# Altium PCB FPGA.PcbDoc (part 4 of 4)
Units mil, origin at the board's own origin, x right, y up, seen from the top; angles counter-clockwise.
Board outline 4000 x 2400 mil, 6 copper layers (Top Layer, InternalPlane1, MidLayer1, InternalPlane2, InternalPlane3, Bottom Layer), stack 58.8 mil thick; 235 components, 235 nets, 1406 pads, 621 vias.
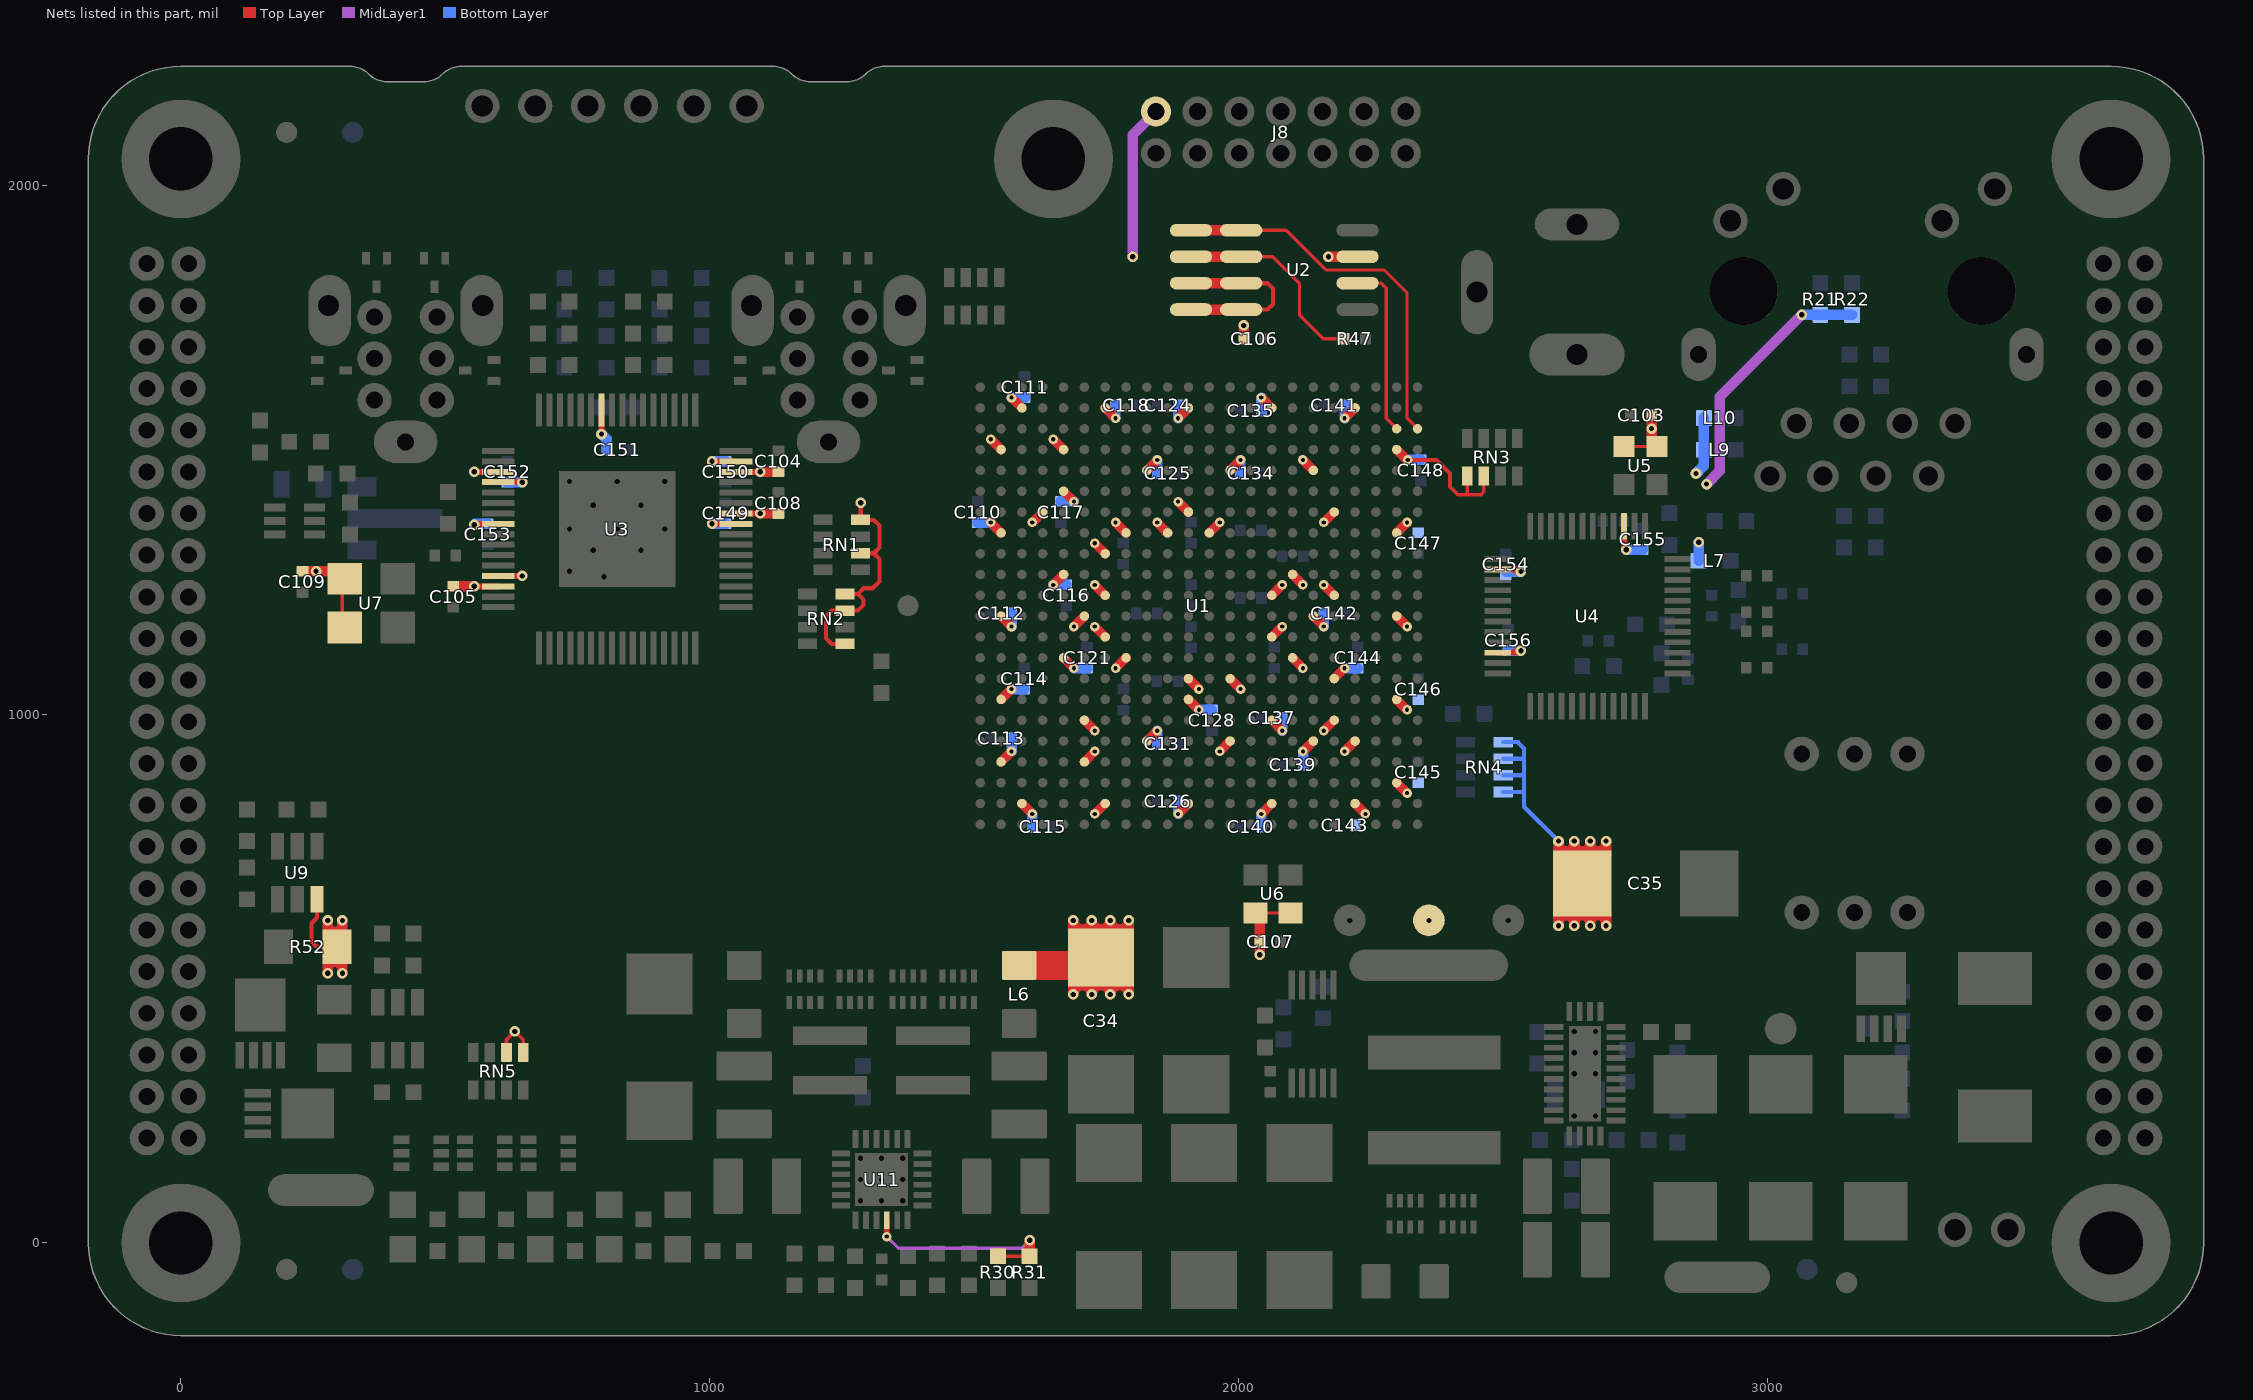
[diagram p8: the nets of this part, all layers, seen from the top]

## Via types
v1: diameter 20, hole 10, Top Layer to Bottom Layer, tented both sides, 322 vias
v2: diameter 18, hole 8, Top Layer to Bottom Layer, tented both sides, 299 vias

## Nets (pads, with @x,y where several pads share a name; then routed paths per layer and width w, separated by ;. In a path a pad name is that pad's centre, name@x,y a point inside that pad or via, vN(x,y) a via of type N, cw(c..) or ccw(c..) an arc to the next point about the centre after c; other vN are vias at no path point) (continued)
VCC3: C34.1 C35.1 C103.1 C104.1 C105.1 C106.1 C107.1 C108.1 C109.1 C110.1 C111.1 C112.1 C113.1 C114.1 C115.1 C116.1 C117.1 C118.1 C121.1 C124.1 C125.1 C126.1 C128.1 C131.1 C134.1 C135.1 C137.1 C139.1 C140.1 C141.1 C142.1 C143.1 C144.1 C145.1 C146.1 C147.1 C148.1 C149.1 C150.1 C151.1 C152.1 C153.1 C154.1 C155.1 C156.1 J8.2 L6.2 L7.1 L9.1 L10.1 pad.0@1910,1765 pad.0@1910,1815 pad.0@2360,610 R21.1 R22.1 R52.1 RN1.2 RN1.4 RN2.1 RN2.3 RN2.4 RN3.1 RN3.2 RN4.1 RN4.2 RN4.3 RN4.4 RN5.5 RN5.6 U1.AA3 U1.AA7 U1.AA11 U1.AA15 U1.AA19 U1.B4 U1.B7 U1.B11 U1.B15 U1.B19 U1.C2 U1.C21 U1.D16 U1.E9 U1.E13 U1.E17 U1.E19 U1.F4 U1.F6 U1.F11 U1.G2 U1.G10 U1.G12 U1.G14 U1.G21 U1.H9 U1.H15 U1.J5 U1.J18 U1.K15 U1.L2 U1.L7 U1.L8 U1.L16 U1.L21 U1.M15 U1.N5 U1.N8 U1.N18 U1.R2 U1.R6 U1.R10 U1.R12 U1.R21 U1.T9 U1.T13 U1.U5 U1.U11 U1.U18 U1.V6 U1.V8 U1.V12 U1.V16 U1.W2 U1.W5 U1.W21 U2.3 U2.7 U2.8 U3.25 U3.26 U3.30 U3.31 U3.42 U3.51 U3.52 U3.56 U3.61 U3.62 U4.27 U4.38 U4.46 U5.1 U5.4 U6.1 U6.4 U7.1 U7.4 U9.6 | length 7959.2
  Top Layer w6: U6.4@2034,624 2040,624 U6.1@2096,624 ; U5.1@2729,1506 U5.4@2791,1506
  Top Layer w7: U7.4@304.63,1270 U7.4@305,1269.63 ; U7.1@305,1164 U7.4@305,1254.63 ; RN5.6@615.75,360.5 615.75,384.25 v1(631.5,400) 647.24,384.25 RN5.5@647.24,360.5 ; v2@2318.7,1480.59 v2(2320,1480.59) 2374.41,1480.59 2400,1455 2400,1430 2415,1415 2432.35,1415 ; RN3.1@2432.35,1450.26 2432.35,1415 ; RN3.2@2463.84,1450.26 2463.84,1420.38 2458.46,1415 2432.35,1415
  Top Layer w8: U9.6@257.5,650 257.5,615 247,604.5 247,570 257,560 R52.1@292,560 ; RN2.1@1255.5,1132.76 1230.75,1132.76 1220,1143.5 1220,1185 1230.75,1195.75 RN2.3@1255.5,1195.75 1280.25,1195.75 1291,1206.5 1291,1216.5 1280.25,1227.24 ; RN2.4@1255.5,1227.24 1280.25,1227.24 ; RN1.2@1285.5,1304.25 1310.25,1304.25 ; v1(1285.5,1400) RN1.4@1285.5,1367.24 1310.25,1367.24 1321,1356.5 1321,1315 1310.25,1304.25 ; U2.8@2005,1765 2055,1765 2065,1775 2065,1805 2055,1815 U2.7@2005,1815 ; 1280.25,1227.24 1291,1237.99 1307.99,1237.99 1321,1251 1321,1293.5 1310.25,1304.25
  Top Layer w11: U4.46@2490,1116.1 2517.97,1116.1 ; U4.38@2490,1273.58 2517.97,1273.58 ; v1@2531.65,1124 2517.97,1116.1 ; v1@2531.65,1265.69 2517.97,1273.58 ; v1@2533.9,1116.1 2517.97,1116.1 ; v1@2533.9,1273.58 2517.97,1273.58 ; v1@2728.9,1311.1 2728.9,1327.03 ; U4.27@2728.9,1355 2728.9,1327.03 ; v1@2736.8,1313.35 2728.9,1327.03
  Top Layer w11.5: v1(554.53,1241.73) U3.62@600,1241.73 ; v1@554.53,1359.84 U3.56@600,1359.84 ; v1(554.53,1458.27) U3.51@600,1458.27 ; U3.61@600,1261.42 v1(645.47,1261.42) ; U3.52@600,1438.58 v1(645.47,1438.58) ; v1(795.47,1529.53) U3.42@795.47,1575 ; v1(1004.53,1359.84) U3.25@1050,1359.84 ; v1(1004.53,1477.95) U3.31@1050,1477.95 ; U3.26@1050,1379.53 v1(1095.47,1379.53) ; U3.30@1050,1458.27 v1(1095.47,1458.27)
  Top Layer w18: v2(1531.3,1362.48) U1.B15@1550.98,1342.8 ; v2(1531.3,1519.96) U1.B19@1550.98,1500.28 ; U1.B4@1550.98,909.72 v2(1570.67,929.41) ; U1.B7@1550.98,1027.83 v2(1570.67,1047.52) ; U1.B11@1550.98,1185.32 v2(1570.67,1165.63) ; v2(1570.67,1598.7) U1.C21@1590.35,1579.02 ; U1.C2@1590.35,830.98 v2(1610.04,811.3) ; v2(1610.04,1362.48) U1.D16@1629.72,1382.17 ; v2(1649.41,1244.37) U1.E13@1669.09,1264.06 ; v2(1649.41,1519.96) U1.E19@1669.09,1500.28 ; U1.E9@1669.09,1106.57 v2(1688.78,1086.89) ; U1.E17@1669.09,1421.54 v2(1688.78,1401.85) ; v2(1688.78,1165.63) U1.F11@1708.46,1185.32 ; U1.F4@1708.46,909.72 v2(1728.15,929.41) ; U1.F6@1708.46,988.46 v2(1728.15,968.78) ; v2(1728.15,811.3) U1.G2@1747.83,830.98 ; v2(1728.15,1165.63) U1.G10@1747.83,1145.94 ; v2(1728.15,1244.37) U1.G12@1747.83,1224.69 ; v2(1728.15,1323.11) U1.G14@1747.83,1303.43 ; U1.G21@1747.83,1579.02 v2(1767.52,1559.33) ; v2(1767.52,1086.89) U1.H9@1787.2,1106.57 ; v2(1767.52,1362.48) U1.H15@1787.2,1342.8 ; U1.J5@1826.57,949.09 v2(1846.26,968.78) ; U1.J18@1826.57,1460.91 v2(1846.26,1480.59) ; v2(1846.26,1362.48) U1.K15@1865.94,1342.8 ; v2(1885.63,811.3) U1.L2@1905.31,830.98 ; v2(1885.63,1401.85) U1.L16@1905.31,1382.17 ; v2(1885.63,1559.33) U1.L21@1905.31,1579.02 ; U1.L7@1905.31,1027.83 v2(1925,1008.15) ; U1.L8@1905.31,1067.2 v2(1925,1047.52) ; U1.M15@1944.68,1342.8 v2(1964.37,1362.48) ; v2(1964.37,929.41) U1.N5@1984.06,949.09 ; U1.N8@1984.06,1067.2 v2(2003.74,1047.52) ; U1.N18@1984.06,1460.91 v2(2003.74,1480.59) ; v2(2043.11,811.3) U1.R2@2062.8,830.98 ; v2(2043.11,1598.7) U1.R21@2062.8,1579.02 ; U1.R6@2062.8,988.46 v2(2082.48,968.78) ; U1.R10@2062.8,1145.94 v2(2082.48,1165.63) ; U1.R12@2062.8,1224.69 v2(2082.48,1244.37) ; U1.T9@2102.17,1106.57 v2(2121.85,1086.89) ; U1.T13@2102.17,1264.06 v2(2121.85,1244.37) ; v2(2121.85,929.41) U1.U5@2141.54,949.09 ; v2(2121.85,1480.59) U1.U18@2141.54,1460.91 ; U1.U11@2141.54,1185.32 v2(2161.22,1165.63) ; v2(2161.22,968.78) U1.V6@2180.91,988.46 ; v2(2161.22,1244.37) U1.V12@2180.91,1224.69 ; v2(2161.22,1362.48) U1.V16@2180.91,1382.17 ; U1.V8@2180.91,1067.2 v2(2200.59,1086.89) ; v2(2200.59,929.41) U1.W5@2220.28,949.09 ; v2(2200.59,1559.33) U1.W21@2220.28,1579.02 ; U1.W2@2220.28,830.98 v2(2239.96,811.3) ; U1.AA3@2299.02,870.35 v2(2318.7,850.67) ; U1.AA7@2299.02,1027.83 v2(2318.7,1008.15) ; U1.AA11@2299.02,1185.32 v2(2318.7,1165.63) ; U1.AA15@2299.02,1342.8 v2(2318.7,1362.48) ; U1.AA19@2299.02,1500.28 v2@2318.7,1480.59
  Top Layer w20: C109.1@230,1270 v1(255.63,1270) U7.4@304.63,1270 ; v1(277.5,510) v1@277.5,518 ; R52.1@277.5,555 v1@277.5,518 ; R52.1@277.5,565 v1@277.5,601.95 ; v1(277.5,610) v1@277.5,602 ; v1(305.5,510) v1@305.5,518 ; R52.1@305.5,555 v1@305.5,518 ; R52.1@305.5,565 v1@305.5,601.95 ; v1(305.5,610) v1@305.5,602 ; C105.1@515,1242 515.27,1241.73 v1(554.53,1241.73) ; v1(1095.47,1379.53) 1129.69,1379.53 C108.1@1130,1379.21 ; v1(1095.47,1458.27) C104.1@1126.94,1458.27 ; C34.1@1687.5,495 v1(1687.5,470) ; C34.1@1687.5,585 v1(1687.5,610) ; C34.1@1722.5,495 v1(1722.5,470) ; C34.1@1722.5,585 v1(1722.5,610) ; C34.1@1757.5,495 v1(1757.5,470) ; C34.1@1757.5,585 v1(1757.5,610) ; C34.1@1792.5,495 v1(1792.5,470) ; C34.1@1792.5,585 v1(1792.5,610) ; pad.0@1910,1765 U2.8@2005,1765 ; pad.0@1910,1815 U2.7@2005,1815 ; C106.1@2010,1710 v1(2010,1735) ; v1(2040,545) C107.1@2040,570 2040,618 2040,624 U6.4@2040,628 ; v1(2170,1865) U2.3@2225,1865 U2.3@2230,1865 ; v1(2605,600) v1@2605,605 ; C35.1@2605,625 v1@2605,605.05 ; C35.1@2605,735 v1@2605,755 ; v1(2605,760) v1@2605,755 ; v1(2635,600) v1@2635,605 ; v1(2635,760) v1@2635,755 ; v1(2665,600) v1@2665,605 ; v1(2665,760) v1@2665,755 ; v1(2695,600) v1@2695,605 ; C35.1@2695,625 v1@2695,605 ; C35.1@2695,735 v1@2695,755 ; v1(2695,760) v1@2695,755 ; U5.4@2781,1517 v1(2781,1540) C103.1@2781,1565 ; v1@277.5,518 cw(c291.5,518) v1@305.5,518 ; v1@277.5,518 cw(c291.5,518) v1@305.5,518 ; v1@277.5,601.95 ccw(c291.5,602) v1@305.5,601.95 ; v1@277.5,601.95 ccw(c291.5,602) v1@305.5,601.95 ; v1@277.5,601.95 cw(c291.5,602) v1@277.5,602 ; v1@277.5,601.95 cw(c291.5,602) v1@277.5,602 ; v1@277.5,601.95 v1@277.5,602 ; v1@305.5,601.95 ccw(c291.5,602) v1@305.5,602 ; v1@305.5,601.95 ccw(c291.5,602) v1@305.5,602 ; v1@305.5,601.95 v1@305.5,602 ; v1(1687.5,470) cw(c1705,470) v1(1722.5,470) ; v1(1687.5,470) cw(c1705,470) v1(1722.5,470) ; v1(1687.5,610) ccw(c1705,610) v1(1722.5,610) ; v1(1687.5,610) ccw(c1705,610) v1(1722.5,610) ; v1(1722.5,470) cw(c1740,470) v1(1757.5,470) ; v1(1722.5,470) cw(c1740,470) v1(1757.5,470) ; v1(1722.5,610) ccw(c1740,610) v1(1757.5,610) ; v1(1722.5,610) ccw(c1740,610) v1(1757.5,610) ; v1(1757.5,470) cw(c1775,470) v1(1792.5,470) ; v1(1757.5,470) cw(c1775,470) v1(1792.5,470) ; v1(1757.5,610) ccw(c1775,610) v1(1792.5,610) ; v1(1757.5,610) ccw(c1775,610) v1(1792.5,610) ; v1@2605,605 cw(c2620,605) v1@2605,605.05 ; v1@2605,605 v1@2605,605.05 ; v1@2605,605.05 cw(c2620,605) v1@2635,605 ; v1@2605,755 ccw(c2620,755) v1@2635,755 ; v1@2635,605 cw(c2650,605) v1@2665,605 ; v1@2635,755 ccw(c2650,755) v1@2665,755 ; v1@2665,605 cw(c2680,605) v1@2695,605 ; v1@2665,755 ccw(c2680,755) v1@2695,755
  Top Layer w25: U6.4@2034,624 U6.4@2040,618 ; U5.4@2785,1512 U5.4@2791,1506
  Top Layer w55: L6.2@1585,525 C34.1@1707.5,525
  MidLayer1 w20: v1(1800,1865) 1800,2095.59 J8.2@1843.78,2139.37 ; v1(2885,1435) 2910,1460 2910,1600 v1(3065,1755)
  Bottom Layer w8: RN4.4@2500.5,852.76 2540,852.76 ; RN4.3@2500.5,884.25 2540,884.25 ; RN4.2@2500.5,915.75 2540,915.75 ; RN4.1@2500.5,947.24 2527.76,947.24 2540,935 2540,915.75 ; v1(2605,760) 2540,825 2540,852.76 ; 2540,852.76 2540,884.25 ; 2540,884.25 2540,915.75
  Bottom Layer w20: v1(554.53,1358) 556.53,1360 C153.1@580,1360 ; C152.1@617,1438.27 645.16,1438.27 v1(645.47,1438.58) ; v1(795.47,1529.53) 805,1520 C151.1@805,1500 ; v1(1004.53,1359.84) 1004.69,1360 C149.1@1030,1360 ; v1(1004.53,1477.95) 1029.69,1477.95 C150.1@1030,1478.27 ; C110.1@1506.61,1362.17 v2@1530.35,1362.17 ; v2@1570.98,930.35 C113.1@1570.98,954.09 ; v2@1570.98,1047.2 C114.1@1594.72,1047.2 ; v2@1570.98,1166.57 C112.1@1570.98,1190.31 ; v2@1570.98,1598.39 C111.1@1595.35,1598.39 ; C115.1@1609.72,786.61 v2@1609.72,810.98 ; v2@1649.72,1244.68 C116.1@1674.09,1244.68 ; C117.1@1664.09,1402.17 v2@1688.46,1402.17 ; v2@1689.72,1086.57 C121.1@1713.46,1086.57 ; v2@1767.2,1560.28 C118.1@1767.2,1584.02 ; C131.1@1845.94,944.09 v2@1845.94,968.46 ; C125.1@1845.94,1455.91 v2@1845.94,1479.65 ; v2@1885.94,811.61 C126.1@1885.94,835.35 ; v2@1885.94,1559.65 C124.1@1885.94,1584.02 ; v2@1925.31,1008.46 C128.1@1949.68,1008.46 ; C134.1@2003.42,1455.91 v2@2003.43,1479.65 ; C140.1@2043.11,786.93 v2(2043.11,811.3) ; C135.1@2043.42,1574.02 v2@2043.43,1598.39 ; v2@2082.8,969.09 C137.1@2082.79,993.46 ; C139.1@2122.16,904.72 v2@2122.17,929.09 ; v2@2160.91,1165.94 C142.1@2160.91,1190.32 ; v2@2200.91,1086.57 C144.1@2225.28,1086.57 ; v2@2200.91,1559.65 C141.1@2200.91,1584.02 ; v2@2320.94,1480.91 C148.1@2344.68,1480.91 ; C154.1@2506.27,1269.58 v1(2533.9,1269.58) ; C156.1@2508.9,1120.1 v1(2533.9,1120.1) ; v1(2732.9,1311.1) C155.1@2764,1311 ; v1(2865,1455) 2880,1470 L9.1@2880,1500 L10.1@2880,1560 ; L7.1@2870,1290 v1(2870,1325) ; v1(3065,1755) R21.1@3100,1755 R22.1@3160,1755
VCC/2: R30.1 R31.2 U11.4 | length 406.4
  Top Layer w7: R30.1@1545,-25 R31.2@1605,-25
  Top Layer w11: v2(1334.84,12.16) U11.4@1334.84,43
  Top Layer w20: R31.2@1605,-25 v1(1605,5)
  MidLayer1 w6: v2(1334.84,12.16) 1357,-10 1590,-10 v1(1605,5)
XCCLK: pad.0@1910,1865 R47.1 U2.6 | length 389.4
  Top Layer w6: U2.6@2005,1865 2065,1865 2115,1815 2115,1755 2160,1710 R47.1@2200,1710
  Top Layer w20: pad.0@1910,1865 U2.6@2005,1865
XMISO: U1.AA20 U2.2 | length 332.4
  Top Layer w6: U2.2@2225,1815 2270,1815 2279.33,1805.67 2279.33,1559.33 U1.AA20@2299.02,1539.65
XMOSI: pad.0@1910,1915 U1.AB20 U2.5 | length 722.7
  Top Layer w6: U2.5@2005,1915 2090,1915 2165,1840 2275,1840 2318.7,1796.3 2318.7,1559.33 U1.AB20@2338.39,1539.65
  Top Layer w20: pad.0@1910,1915 U2.5@2005,1915
pads on no net: FD1.0 FD2.0 FD3.0 FD4.0 FD5.0 FD6.0 FD7.0 J3.1 J4.1 J5.2 J6.7 J6.15 J6.16 J8.12 J8.14 J9.3 Q4.3 RN5.2 U1.A4 U1.A5 U1.A7 U1.A8 U1.A9 U1.A16 U1.A17 U1.A18 U1.AA16 U1.AA18 U1.AA21 U1.AB15 U1.AB16 U1.AB17 U1.AB18 U1.AB19 U1.B6 U1.B8 U1.B12 U1.B16 U1.B18 U1.C1 U1.C5 U1.C6 U1.C7 U1.C8 U1.C9 U1.C12 U1.C15 U1.C16 U1.C17 U1.D1 U1.D6 U1.D7 U1.D8 U1.D9 U1.D10 U1.D11 U1.D12 U1.D13 U1.D14 U1.D15 U1.D17 U1.E1 U1.E8 U1.E10 U1.E12 U1.E14 U1.E16 U1.F1 U1.F8 U1.F9 U1.F10 U1.F12 U1.F13 U1.F14 U1.F15 U1.F16 U1.F17 U1.F18 U1.F19 U1.F20 U1.F21 U1.G1 U1.G6 U1.G8 U1.G9 U1.G11 U1.G13 U1.G16 U1.G17 U1.G19 U1.G20 U1.G22 U1.H1 U1.H2 U1.H3 U1.H5 U1.H6 U1.H8 U1.H10 U1.H11 U1.H12 U1.H13 U1.H14 U1.H16 U1.H17 U1.H18 U1.H19 U1.H20 U1.H21 U1.H22 U1.J1 U1.J3 U1.J4 U1.J6 U1.J7 U1.J16 U1.J17 U1.J19 U1.J20 U1.J22 U1.K1 U1.K2 U1.K3 U1.K4 U1.K5 U1.K6 U1.K7 U1.K8 U1.K16 U1.K17 U1.K18 U1.K19 U1.K20 U1.K21 U1.K22 U1.L1 U1.L3 U1.L4 U1.L6 U1.L15 U1.L17 U1.L19 U1.L20 U1.L22 U1.M1 U1.M2 U1.M5 U1.M6 U1.M7 U1.M8 U1.M16 U1.M17 U1.M18 U1.M19 U1.M20 U1.M21 U1.M22 U1.N1 U1.N6 U1.N7 U1.N16 U1.N19 U1.N20 U1.P1 U1.P2 U1.P3 U1.P4 U1.P6 U1.P7 U1.P8 U1.P15 U1.P16 U1.P17 U1.P18 U1.P19 U1.P20 U1.P21 U1.P22 U1.R1 U1.R3 U1.R4 U1.R7 U1.R8 U1.R9 U1.R11 U1.R13 U1.R15 U1.R16 U1.R17 U1.R19 U1.R20 U1.R22 U1.T4 U1.T7 U1.T8 U1.T10 U1.T11 U1.T12 U1.T14 U1.T15 U1.T16 U1.T17 U1.T18 U1.T19 U1.T20 U1.T21 U1.T22 U1.U4 U1.U6 U1.U8 U1.U9 U1.U12 U1.U13 U1.U14 U1.U16 U1.U17 U1.U19 U1.U20 U1.U22 U1.V5 U1.V11 U1.V15 U1.V17 U1.V20 U1.V21 U1.V22 U1.W9 U1.W10 U1.W11 U1.W14 U1.W15 U1.W20 U1.W22 U1.Y18 U3.3 U3.16 U3.60 U4.9 U4.10 U4.15 U4.25 U12.6 U12.7 U13.2 U13.4 U13.5

## Polygon pours and split planes (outlines as drawn)
GND on Bottom Layer "Bot" (hatched 90Degree grid 19 track 20, remove dead copper, pour order 3): -175,-175 3825,-175 3825,2225 -175,2225
GND on MidLayer1 "Mid1" (hatched 90Degree grid 19 track 20, remove dead copper, pour order 4): -175,-175 3825,-175 3825,2225 -175,2225
GND on InternalPlane1 (split plane): 173 vertices, not listed, extent -154.97,-154.97 3804.97,2204.97
1.2V on InternalPlane2 (split plane): 2133.97,1453.34 2133.97,770 2134.09,769.05 2134.21,768.1 2134.22,768.07 2134.23,768.04 2134.59,767.16 2134.95,766.27 2134.97,766.25 2134.98,766.22 2135.57,765.45 2136.14,764.69 2227.44,671.9 2227.43,428.13 2176.87,377.56 2060,377.56 2058.04,377.31 2056.22,376.55 2054.65,375.35 2001.87,322.56 1625,322.56 1623.04,322.31 1621.22,321.55 1619.65,320.35 1601.87,302.56 838.13,302.56 812.56,328.13 812.56,561.87 843.13,592.44 1508.46,592.44 1510.42,592.69 1511.49,593.14 1512.25,593.45 1513.81,594.65 1713.81,794.65 1715.02,796.22 1715.77,798.04 1716.03,800 1716.03,1095.04 1716.03,1453.34
VCC on InternalPlane2 (split plane): 2282.44,68.13 2171.87,-42.44 563.13,-42.44 207.56,313.13 207.56,466.87 298.13,557.44 797.44,557.44 797.44,325 797.69,323.04 798.14,321.97 798.45,321.22 799.65,319.65 829.65,289.65 831.22,288.45 831.97,288.14 833.04,287.69 835,287.44 1605,287.44 1606.96,287.69 1608.03,288.14 1608.78,288.45 1610.35,289.65 1628.13,307.44 2005,307.44 2006.96,307.69 2008.03,308.14 2008.78,308.45 2010.35,309.65 2063.13,362.44 2180,362.44 2181.96,362.69 2183.25,363.23 2183.78,363.45 2185.35,364.65 2240.35,419.65 2241.55,421.22 2242.31,423.04 2242.56,425 2242.56,667.44 2282.43,667.44
GND on InternalPlane2 (split plane): 173 vertices, not listed, extent -154.97,-154.97 3804.97,2204.97
VCC3 on InternalPlane3 (split plane): 2412.44,1861.87 2412.44,1775 2412.44,1660 2412.69,1658.04 2413.14,1656.97 2413.45,1656.22 2414.65,1654.65 2499.65,1569.65 2501.22,1568.45 2501.97,1568.14 2503.04,1567.69 2505,1567.44 2771.87,1567.44 2924.65,1414.65 2926.22,1413.45 2928.04,1412.69 2930,1412.44 3326.87,1412.44 3417.44,1321.87 3417.44,553.13 3339.65,475.35 3338.45,473.78 3338.14,473.03 3337.69,471.96 3337.44,470 3337.44,387.56 368.13,387.56 242.56,513.13 242.56,1437.44 485,1437.44 486.96,1437.69 488.03,1438.14 488.78,1438.45 490.35,1439.65 593.13,1542.44 1350,1542.44 1351.96,1542.69 1353.03,1543.14 1353.78,1543.45 1355.35,1544.65 1445.35,1634.65 1446.55,1636.22 1447.31,1638.04 1447.56,1640 1447.56,1892.44 2381.87,1892.44
PWR on InternalPlane3 (split plane): 2904.65,1709.65 2906.22,1708.45 2908.04,1707.69 2908.27,1707.66 2910,1707.44 3455,1707.44 3456.96,1707.69 3458.03,1708.14 3458.78,1708.45 3460.35,1709.65 3478.13,1727.44 3537.44,1727.44 3537.44,70 3537.44,-12.44 3417.56,-12.44 3417.56,111.87 3430.35,124.65 3431.55,126.22 3431.86,126.97 3432.31,128.04 3432.56,130 3432.56,300 3432.31,301.96 3431.55,303.78 3430.35,305.35 3352.56,383.13 3352.56,466.87 3430.35,544.65 3431.55,546.22 3432.31,548.04 3432.56,550 3432.56,1325 3432.31,1326.96 3431.55,1328.78 3430.35,1330.35 3335.35,1425.35 3333.78,1426.55 3333.03,1426.86 3331.96,1427.31 3330,1427.56 2933.13,1427.56 2780.35,1580.35 2778.78,1581.55 2778.03,1581.86 2776.96,1582.31 2775,1582.56 2508.13,1582.56 2427.56,1663.13 2427.56,1767.44 2846.87,1767.44
V-FAULT on InternalPlane3 (split plane): 1432.44,1643.13 1346.87,1557.56 590,1557.56 588.04,1557.31 586.22,1556.55 584.65,1555.35 481.87,1452.56 242.56,1452.56 242.56,1550 242.56,1846.87 288.13,1892.44 1432.44,1892.44
GND on InternalPlane3 (split plane): 173 vertices, not listed, extent -154.97,-154.97 3804.97,2204.97

## Keep-outs
Top Layer:
  rectangle: 2850,1740 2880,2100
  rectangle: 3480,1740 3510,2100
  rectangle: 2850,2100 3510,2225
MidLayer1:
  lines w5: 320,2220 cw(c320,2170.5) 355,2205.5 ccw(c390,2240.5) 390,2191 460,2191 ccw(c460,2240.5) 495,2205.5 cw(c530,2170.5) 530,2220 ; 1120,2220 cw(c1120,2170.5) 1155,2205.5 ccw(c1190,2240.5) 1190,2191 1260,2191 ccw(c1260,2240.5) 1295,2205.5 cw(c1330,2170.5) 1330,2220 ; -170,0 ccw(c0,0) 0,-170 3650,-170 ccw(c3650,0) 3820,0 3820,2050 ccw(c3650,2050) 3650,2220 0,2220 ccw(c0,2050) -170,2050 -170,0
Bottom Layer:
  circle w5: c325,2100 r60
  circle w5: c325,-50 r60
  circle w5: c3075,-50 r60
  lines w5: 320,2220 cw(c320,2170.5) 355,2205.5 ccw(c390,2240.5) 390,2191 460,2191 ccw(c460,2240.5) 495,2205.5 cw(c530,2170.5) 530,2220 ; 1120,2220 cw(c1120,2170.5) 1155,2205.5 ccw(c1190,2240.5) 1190,2191 1260,2191 ccw(c1260,2240.5) 1295,2205.5 cw(c1330,2170.5) 1330,2220 ; -170,0 ccw(c0,0) 0,-170 3650,-170 ccw(c3650,0) 3820,0 3820,2050 ccw(c3650,2050) 3650,2220 0,2220 ccw(c0,2050) -170,2050 -170,0

## Other copper
Top Layer:
  rectangle net NetC1_1: 1340,370 1515,420
  rectangle net NetC2_1: 1135,370 1310,420
  rectangle net NetL3_1: 1340,270 1505,320
  rectangle net NetL2_1: 1145,270 1310,320
  rectangle net GND: 1567.5,55 1642.5,207.5
  rectangle net GND: 1007.5,55 1082.5,207.5
  rectangle net NetJ6_6: 2950,1247 2970,1262
  rectangle net NetJ6_2: 2950,1142 2970,1157
  rectangle net NetJ6_3: 2950,1193 2970,1208
  rectangle net NetJ6_1: 2950,1088 2970,1103
  rectangle net GND: 2625,57.5 2685,456
  rectangle net GND: 2675,5 3205,115
  rectangle net NetC16_2: 2507.5,329.84 2567.5,408.58
  rectangle net V-IN: 2741.15,299.5 2800,349.53
  rectangle net GND: 2741,384 2773,414
  rectangle net VCC: 1765,-125 2177.5,-15
  rectangle net NetC3_1: 2342.5,-125 2592.5,-20
  rectangle net NetQ2_5: 102.5,480 197.5,592.5
  rectangle net 3.3V-OUT: 14.37,330 162.8,380
  region net NetQ1_5: 277.5,292.5 277.5,197.5 322.5,197.5 322.5,292.5
  rectangle net NetQ1_5: 395,430 410,480
  rectangle net VCC: 375,430 389,480
  rectangle net NetL2_1: 1200,165 1240,295
  rectangle net NetL2_1: 1205.5,149.53 1220,170
  region net NetL3_1: 1444.5,170 1430,170 1430,149.53 1444.5,149.53
  region net NetL3_1: 1450,295 1410,295 1410,165 1450,165
  rectangle net GND: 1435,523.5 1505,541.5
  rectangle net GND: 1340,523.5 1410,541.5
  rectangle net GND: 1240,523.5 1310,541.5
  rectangle net GND: 1145,523.5 1215,541.5
  region net GND: 2350,11.5 2280,11.5 2280,-6.5 2350,-6.5
  rectangle net VCC: 2150,-125 2287.5,-20
  region net GND: 2450,11.5 2380,11.5 2380,-6.5 2450,-6.5
  region net NetC3_1: 2344.53,102.5 2344.53,132.5 2285.47,132.5 2285.47,102.5
  region net NetC3_1: 2444.53,102.5 2444.53,132.5 2385.47,132.5 2385.47,102.5
  rectangle net NetC3_1: 2472.5,-25 2592.5,187.5
  rectangle net NetC3_1: 2510,182.5 2565,215
  rectangle net NetC3_1: 2557.5,180 2573.75,196.25
  region net NetC1_1: 1440.47,432.5 1440.47,402.5 1499.53,402.5 1499.53,432.5
  region net NetC1_1: 1345.47,432.5 1345.47,402.5 1404.53,402.5 1404.53,432.5
  region net NetC2_1: 1245.47,432.5 1245.47,402.5 1304.53,402.5 1304.53,432.5
  region net NetC2_1: 1150.47,432.5 1150.47,402.5 1209.53,402.5 1209.53,432.5
  rectangle net NetL3_1: 1445,200 1499.5,275
  region net NetL2_1: 1205,275 1150.5,275 1150.5,200 1205,200
  rectangle net NetC2_1: 1012.5,352.5 1117.5,402.5
  rectangle net NetC1_1: 1532.5,352.5 1637.5,402.5
  rectangle net NetC1_1: 1487.5,370 1637.5,427.5
  rectangle net NetC2_1: 1012.5,370 1162.5,427.5
  rectangle net VCC: 1314,-35 1336,-6.81
  rectangle net 5V-OUT: 95,230 170,309.47
  rectangle net NetQ2_4: 185,330 215,350
  region net GND: 552.5,220 532.5,220 532.5,195.59 552.5,195.59
  region net GND: 432.5,220 412.5,220 412.5,195.59 432.5,195.59
  region net GND: 672.5,220 652.5,220 652.5,195.59 672.5,195.59
  region net GND: 627.5,144.41 607.5,144.41 607.5,120 627.5,120
  region net GND: 747.5,144.41 727.5,144.41 727.5,120 747.5,120
  region net GND: 507.5,144.41 487.5,144.41 487.5,120 507.5,120
  rectangle net NetD6_1: 597.5,195.59 617.5,220
  rectangle net VCC3: 2000,1715 2020,1765
  rectangle net VCC: 1426.84,70.79 1500,130
  rectangle net VCC: 1210,70.79 1223.2,83.5
  rectangle net NetQ1_5: 257.5,280 322.5,337.5
  rectangle net VCC: 1314,-40 1336,-25
  rectangle net VCC: 2065,315 2100,335
  rectangle net VCC: 1157.5,67.5 1220,130
  rectangle net PWR: 3360,425 3500,460
  rectangle net GND: 2700,105 2850,140
  rectangle net PWR: 3215,450 3430,550
  rectangle net V-IN: 2885,245 3205,355
  rectangle net V-IN: 3175,350 3227.8,430
  rectangle net GND: 3335,195 3375,280
  rectangle net NetC3_1: 2225,125 2520,215
  rectangle net NetC16_2: 2225,325 2542.5,415
  text ".Layer_Name" at -150,-275 h50
MidLayer1:
  pour cut-out: 255,1795 255,1575 300,1530 1355,1530 1400,1575 1400,1795 1155,1795 1155,1816 1080,1816 1080,1795
  text ".Layer_Name" at -150,-275 h50
Bottom Layer:
  rectangle net GND: 3067,1162 3115,1192.5
  rectangle net VCC3: 2494,1263.5 2513.5,1279.5
  rectangle net V-FAULT: 255,1515 285,1535
  rectangle net GND: 385,1220 515,1460
  rectangle net NetC4_1: 890,1720 1000,1760
  rectangle net NetC4_1: 915,1700 929,1723
  region net NetC4_1: 975,1723 961,1723 961,1700 975,1700
  rectangle net NetC4_1: 915,1757 929,1780
  region net NetC4_1: 975,1780 961,1780 961,1757 975,1757
  region net NetC5_1: 795,1780 781,1780 781,1757 795,1757
  rectangle net NetC5_1: 735,1757 749,1780
  region net NetC5_1: 795,1723 781,1723 781,1700 795,1700
  rectangle net NetC5_1: 735,1700 749,1723
  rectangle net GND: 915,1810 975,1840
  rectangle net GND: 735,1810 795,1840
  rectangle net NetC5_1: 710,1720 820,1760
  rectangle net V-FAULT: 269,1412 342.5,1448
  rectangle net GND: 2650,1100 2675.84,1150
  region net 1.8V: 2709.37,1150 2683.53,1150 2683.53,1100 2709.37,1100
  region net 1.8V-AN: 2785,1116.26 2785,1090.42 2873.9,1090.42 2873.9,1116.26
  region net GND: 2873.9,1056.89 2873.9,1082.73 2785,1082.73 2785,1056.89
  rectangle net VCC3: 2210.59,790 2230.59,820
  rectangle net GND: 2170.59,790 2190.59,820
  region net VCC3: 2340,860.04 2340,880.04 2310,880.04 2310,860.04
  region net GND: 2340,900.04 2340,920.04 2310,920.04 2310,900.04
  region net VCC3: 2340,1017.52 2340,1037.52 2310,1037.52 2310,1017.52
  region net GND: 2340,1057.52 2340,1077.52 2310,1077.52 2310,1057.52
  region net GND: 2340,1293.11 2340,1313.11 2310,1313.11 2310,1293.11
  region net VCC3: 2340,1333.11 2340,1353.11 2310,1353.11 2310,1333.11
  rectangle net VCC3: 2308.7,1333.11 2328.7,1362.48
  rectangle net GND: 2308.7,1283.74 2328.7,1313.11
  rectangle net VCC3: 2308.7,1008.15 2328.7,1037.52
  rectangle net GND: 2308.7,1057.52 2328.7,1086.89
  rectangle net VCC3: 2308.7,850.67 2328.7,880.04
  rectangle net GND: 2308.7,900.04 2328.7,929.41
  region net VCC3: 2239.96,801.3 2239.96,821.3 2210.59,821.3 2210.59,801.3
  region net GND: 2190.59,801.3 2190.59,821.3 2161.22,821.3 2161.22,801.3
  rectangle net GND: 2729,1371 2759,1393.9
  rectangle net GND: 2494,1287.25 2509,1303.5
  pour cut-out: 165,1485 150,1470 150,1400 165,1385 285,1385 285,1265 510,1265 510,1485 540,1515 540,1810 310,1810 310,1485
  pour cut-out: 1340,1810 1340,1510 1290,1460 1160,1460 1110,1510 1110,1810
  pour cut-out: 690,1865 1020,1865 1030,1855 1030,1620 950,1540 760,1540 680,1620 680,1855
  pour cut-out: 2040,355 2155,355 2200,400 2200,520 2090,520 2040,470
  pour cut-out: 1245,240 1335,240 1335,375 1245,375
  pour cut-out: 2605,1030 3046.47,1030 3092.5,1069.12 3092.5,1275 3095,1275 3250,1275 3250,1535 3255,1540 3255,1715 3100,1715 2985,1600 2855,1600 2840,1585 2840,1440 2827.5,1427.5 2677.5,1427.5 2605,1355
  pour cut-out: 2355,810 2540,810 2540,1040 2355,1040
  pour cut-out: 3060,1860 3060,1685 3205,1685 3205,1860
  pour cut-out: 2520,22 2675,22 2675,150 2875,150 2875,405 2690,405 2690,350 2605,350 2605,435 2520,435
  pour cut-out: 3150,520 3150,275 3210,275 3210,210 3300,210 3300,520
  text ".Layer_Name" at -150,-275 h50
InternalPlane1 (plane layer: these items are gaps in the copper):
  text ".Layer_Name" at -150,-275 h50
InternalPlane2 (plane layer: these items are gaps in the copper):
  lines w15: 805,565 840,600 1508.46,600 1708.46,800 1708.46,1095.04 1708.46,1460.91 2141.53,1460.91 2141.53,770 2235,675 ; 805,565 295,565 200,470 200,310 560,-50 2175,-50 2290,65 2290,675 2235,675 ; 805,565 805,325 835,295 1605,295 1625,315 2005,315 2060,370 2180,370 2235,425 2235,675
  text ".Layer_Name" at -150,-275 h50
InternalPlane3 (plane layer: these items are gaps in the copper):
  lines w10: 2542.71,1664.61 ccw(c2585,1680) 2585,1635 ; 2542.71,1695.39 cw(c2585,1680) 2585,1725 ; 2607.5,1635 2627.5,1635 ; 2607.5,1725 2630,1725 ; 2650,1635 2672.5,1635 ; 2652.5,1725 2672.5,1725 ; 2695,1635 ccw(c2695,1680) 2737.29,1664.61 ; 2695,1725 cw(c2695,1680) 2737.29,1695.39 ; 3439.61,67.29 cw(c3455,25) 3474.02,65.78 ; 3495.78,44.02 cw(c3455,25) 3497.29,9.61
  lines w15: 235,1445 485,1445 590,1550 1350,1550 ; 1105,1550 1350,1550 ; 1440,1900 1440,1640 1350,1550 ; 2420,1775 2850,1775 2910,1715 3455,1715 3475,1735 3545,1735 3545,70 3545,-20 3410,-20 3410,115 3425,130 3425,300 3345,380 ; 2420,1775 2420,1865 2385,1900 285,1900 235,1850 235,1550 235,510 365,380 3345,380 ; 2420,1775 2420,1660 2505,1575 2775,1575 2930,1420 3330,1420 3425,1325 3425,550 3345,470 3345,380
  text ".Layer_Name" at -150,-275 h50

## Silkscreen, mask and mechanical layers (free items; w line width, h text height)
Top Overlay:
  circle w15: c1425,775 r15
  region: 1840,1910 1800,1960 1760,1910
  region: 460,2105 510,2145 460,2185
  lines w7: 267,2100 280,2100 ; 315,1985 1120,1985 ; 1715,2180 1740,2195 ; 1715,2210 1740,2195 ; 1515,2155 1555,2195 1740,2195 ; 1515,2155 1155,2155 1155,1930 1515,1930 1515,2155 ; 460,2105 460,2185 510,2145 460,2105 ; 1760,1910 1800,1960 1840,1910 1760,1910
  text "TMS" at 1220,2140 h28 r270
  text "TCK" at 1270,2140 h28 r270
  text "TDO" at 1320,2140 h28 r270
  text "VDD" at 1170,2135 h28 r270
  text "TDI" at 1370,2135 h28 r270
  text "NC" at 1420,2125 h28 r270
  text "NC" at 1470,2125 h28 r270
  text "GND" at 555,2080 h30 r270
  text "TMS" at 655,2080 h30 r270
  text "NC" at 755,2080 h30 r270
  text "TCK" at 855,2080 h30 r270
  text "TDO" at 955,2080 h30 r270
  text "TDI" at 1055,2080 h30 r270
  text "SOFT" at 355,2055 h32
  text "GND" at 1170,2025 h28 r270
  text "GND" at 1220,2025 h28 r270
  text "GND" at 1270,2025 h28 r270
  text "GND" at 1320,2025 h28 r270
  text "GND" at 1370,2025 h28 r270
  text "GND" at 1420,2025 h28 r270
  text "GND" at 1470,2025 h28 r270
  text "JTAG" at 350,2005 h32
  text "GND" at 555,1965 h30 r270
  text "RTS" at 655,1965 h30 r270
  text "NC" at 755,1965 h30 r270
  text "RxD" at 855,1965 h30 r270
  text "TxD" at 955,1965 h30 r270
  text "CTS" at 1055,1965 h30 r270
  text "SERIAL" at 350,1935 h32
  text "(3.3V)" at 355,1890 h30
  text "1" at 70,1860 h32 r270
  text "1" at 3770,1860 h32 r270
  text "J4" at 210,1850 h50
  text "2" at -110,1840 h32 r90
  text "2" at 3590,1840 h32 r90
  text "JTAG" at 1660,1830 h50
  text "5" at 60,1700 h32 r270
  text "5" at 3760,1700 h32 r270
  text "J5" at 2450,1605 h50
  text "10" at -110,1520 h32 r90
  text "10" at 3590,1513.7 h32 r90
  text "J3" at 1310,1480 h50
  text "15" at 60,1320 h32 r270
  text "15" at 3760,1320 h32 r270
  text "J6" at 3380,1310 h50
  text "20" at -110,1120 h32 r90
  text "20" at 3590,1120 h32 r90
  text "J1" at 75,1110 h50 r270
  text "BOARD ID" at 2975,995 h50
  text "25" at 60,930 h32 r270
  text "25" at 3760,930 h32 r270
  text "J2" at 3580,900 h50 r90
  text "IEEE-1394 / ETHERNET  FPGA" at 160,885 h100
  text "Rev 2.1 (December 2015)" at 320,780 h90
  text "30" at -110,725 h32 r90
  text "30" at 3590,725 h32 r90
  text "(C) 2010-2015, Johns Hopkins University" at 320,670 h80
  text "1.2V" at 2155,655 h60
  text "3.3V" at 2315,655 h60
  text "5.0V" at 2460,655 h60
  text "35" at 3760,535 h32 r270
  text "GND" at 2525,507.5 h50
  text "14" at 2555,474 h50 r270
  text "V-IN" at 2975,445 h60
  text "10" at 2755,425 h50 r90
  text "40" at -110,335 h32 r90
  text "40" at 3592.5,330 h28 r90
  text "+" at 475,290 h35
  text "43" at 60,222.5 h32 r270
  text "43" at 3760,222.5 h32 r270
  text "24" at 2555,219 h50 r270
  text "44" at -110,170 h32 r90
  text "44" at 3592.5,170 h32 r90
  text "GND" at 217.5,25 h50
  text "5V" at 390,-90 h60
  text "3.3V" at 500,-90 h60
  text "1.2V" at 635,-90 h60
  text "ST" at 780,-90 h60
  text "FPGA" at 880,-90 h60
  text "-" at 3260,-115 h35
  text "+" at 3515,-115 h35
  text "GND" at 2857.5,-140 h50
  text "POWER OK" at 425,-145 h60
  text "PROG" at 880,-145 h60
  text "8-25V" at 3315,-145 h35
  text ".Layer_Name" at -150,-275 h50
Bottom Overlay:
  circle w7: c2550,2120 r25
  circle w20: c2645,2120 r9
  circle w7: c2740,2120 r25
  lines w7: 260,1840 260,2215 ; 590,1840 590,2100 ; 1060,1840 1060,2100 ; 1390,1840 1390,2215 ; 2540,2120 2560,2120 ; 2730,2120 2750,2120 ; 2740,2110 2740,2130
  lines w10: 2577,2120 2610,2120 ; 2645,2120 2713,2120
  lines w15: 2662.14,2089.69 cw(c2644.64,2120) 2662.14,2150.31
  text "8-25V" at 2735,2010 h75
  text "J4" at 695,1910 h50
  text "J3" at 1040,1910 h50
  text "J1" at 135,925 h40
  text "J2" at 3575,925 h40
  text "-" at 3375,-80 h35
  text "+" at 3472,-80 h35
  text ".Layer_Name" at -150,-275 h50
Top Paste:
  rectangle: 2627,330 2683,350
  rectangle: 2627,370 2683,390
  rectangle: 2645,400 2665,410
  rectangle: 2627,250 2683,270
  rectangle: 2627,290 2683,310
  rectangle: 755,1437.5 775,1457.5
  rectangle: 785,1437.5 805,1457.5
  rectangle: 815,1360 835,1387.5
  rectangle: 905,1277.5 925,1302.5
  rectangle: 905,1242.5 925,1267.5
  rectangle: 815,1402.5 835,1427.5
  rectangle: 905,1402.5 925,1427.5
  rectangle: 905,1360 925,1387.5
  rectangle: 905,1317.5 925,1340
  rectangle: 725,1402.5 745,1427.5
  rectangle: 725,1360 745,1387.5
  rectangle: 815,1317.5 835,1340
  rectangle: 815,1277.5 835,1302.5
  rectangle: 725,1317.5 745,1340
  rectangle: 725,1280 745,1302.5
  rectangle: 875,1242.5 895,1267.5
  rectangle: 845,1242.5 865,1267.5
  rectangle: 815,1242.5 835,1267.5
  rectangle: 755,1242.5 775,1267.5
  rectangle: 845,1437.5 865,1457.5
  rectangle: 875,1437.5 895,1457.5
  rectangle: 725,1242.5 745,1260
  rectangle: 755,1410 775,1427.5
  rectangle: 755,1402.5 767.5,1427.5
  region: 805,1427.5 792.5,1427.5 792.5,1402.5 805,1402.5
  region: 805,1427.5 785,1427.5 785,1410 805,1410
  region: 895,1427.5 875,1427.5 875,1410 895,1410
  region: 895,1427.5 882.5,1427.5 882.5,1402.5 895,1402.5
  rectangle: 845,1402.5 857.5,1427.5
  rectangle: 845,1410 865,1427.5
  region: 895,1342.5 875,1342.5 875,1325 895,1325
  region: 895,1342.5 882.5,1342.5 882.5,1317.5 895,1317.5
  rectangle: 845,1317.5 857.5,1342.5
  rectangle: 845,1325 865,1342.5
  region: 805,1342.5 785,1342.5 785,1325 805,1325
  region: 805,1342.5 792.5,1342.5 792.5,1317.5 805,1317.5
  rectangle: 755,1317.5 767.5,1342.5
  rectangle: 755,1325 775,1342.5
  region: 805,1295 785,1295 785,1277.5 805,1277.5
  region: 805,1302.5 792.5,1302.5 792.5,1277.5 805,1277.5
  rectangle: 755,1277.5 767.5,1302.5
  rectangle: 755,1277.5 775,1295
  region: 895,1295 875,1295 875,1277.5 895,1277.5
  region: 895,1302.5 882.5,1302.5 882.5,1277.5 895,1277.5
  rectangle: 845,1277.5 857.5,1302.5
  rectangle: 845,1277.5 865,1295
  region: 805,1380 785,1380 785,1357.5 805,1357.5
  region: 805,1387.5 792.5,1387.5 792.5,1362.5 805,1362.5
  rectangle: 755,1362.5 767.5,1387.5
  rectangle: 755,1357.5 775,1380
  rectangle: 845,1357.5 865,1380
  rectangle: 845,1362.5 857.5,1387.5
  region: 895,1387.5 882.5,1387.5 882.5,1362.5 895,1362.5
  region: 895,1380 875,1380 875,1357.5 895,1357.5
  rectangle: 2645,230 2665,240
  lines w5: 765,1297.5 770,1292.5 ; 765,1322.5 770,1327.5 ; 765,1382.5 770,1377.5 ; 765,1407.5 770,1412.5 ; 767.5,1300 772.5,1295 ; 767.5,1320 772.5,1325 ; 767.5,1385 772.5,1380 ; 767.5,1405 772.5,1410 ; 787.5,1295 792.5,1300 ; 787.5,1325 792.5,1320 ; 787.5,1380 792.5,1385 ; 787.5,1410 792.5,1405 ; 790,1292.5 795,1297.5 ; 790,1327.5 795,1322.5 ; 790,1377.5 795,1382.5 ; 790,1412.5 795,1407.5 ; 855,1297.5 860,1292.5 ; 855,1322.5 860,1327.5 ; 855,1382.5 860,1377.5 ; 855,1407.5 860,1412.5 ; 857.5,1300 862.5,1295 ; 857.5,1320 862.5,1325 ; 857.5,1385 862.5,1380 ; 857.5,1405 862.5,1410 ; 877.5,1295 882.5,1300 ; 877.5,1325 882.5,1320 ; 877.5,1380 882.5,1385 ; 877.5,1410 882.5,1405 ; 880,1292.5 885,1297.5 ; 880,1327.5 885,1322.5 ; 880,1377.5 885,1382.5 ; 880,1412.5 885,1407.5 ; 1292.5,90 1292.5,110 1295,112.5 1315,112.5 1317.5,110 1317.5,90 1315,87.5 1295,87.5 1292.5,90 ; 1292.5,130 1292.5,150 1295,152.5 1315,152.5 1317.5,150 1317.5,130 1315,127.5 1295,127.5 1292.5,130 ; 1332.5,90 1335,87.5 1355,87.5 1357.5,90 1357.5,110 1355,112.5 1335,112.5 1332.5,110 1332.5,90 ; 1332.5,130 1332.5,150 1335,152.5 1355,152.5 1357.5,150 1357.5,130 1355,127.5 1335,127.5 1332.5,130
  text ".Layer_Name" at -150,-275 h50
Bottom Paste:
  text ".Layer_Name" at -150,-275 h50
Top Solder:
  text ".Layer_Name" at -150,-275 h50
Bottom Solder:
  text ".Layer_Name" at -150,-275 h50
Mechanical 1:
  the board outline again, w5
Mechanical 2:
  rectangle: 2030,2000 2130,2021.26
  rectangle: 505,1197 525,1247
  rectangle: 220,1225 240,1275
  rectangle: 1120,1453 1140,1503
  rectangle: 1120,1374.21 1140,1424.21
  rectangle: 2050,280 2070,330
  rectangle: 915,-400 935,-350
  region: 2085,560 2085,580 2035,580 2035,560
  region: 2786,1555 2786,1575 2736,1575 2736,1555
  region: 2055,1700 2055,1720 2005,1720 2005,1700
  rectangle: 1315,-75 1335,-25
  lines w4: 907,-386 907,-412 943,-412 943,-386 ; 907,-364 907,-338 943,-338 943,-364
  lines w10: 400,-900 400,-475 4125,-475 ; 400,-770 2350,-770 ; 2350,-900 2350,-475 ; -475,-900 4125,-900 4125,2550 -475,2550 -475,-900
  text "Top Assembly Drawing" at 600,2300 h250
  text "NOTE:" at -350,-300 h125
  text "1)" at -250,-400 h100
  text "Components of symbol" at -125,-400 h100
  text "are one of C101-162 and have the same values (0.1uF cap. in 0402)." at 1000,-400 h100
  text "Title:" at 450,-575 h100
  text "Johns Hopkins University" at 2400,-625 h150
  text "IEEE-1394/Ethernet FPGA" at 550,-700 h150
  text "Laboratory for Computational" at 2475,-750 h100
  text "Sensing and Robotics" at 2475,-850 h100
  text "Date:" at 450,-865 h100
  text ".Print_Date" at 725,-865 h100
  text "Rev:" at 1825,-865 h100
  text "2.1" at 2100,-865 h100
Mechanical 3:
  rectangle: 2840,1060 2860,1110
  rectangle: 2885,1180 2905,1230
  rectangle: 2754,1306 2774,1356
  rectangle: 2495,1258.5 2515,1308.5
  rectangle: 2500,1115 2520,1165
  region: 2705,1129 2705,1149 2655,1149 2655,1129
  region: 2734,1355 2734,1375 2684,1375 2684,1355
  region: 3072,1217.5 3072,1237.5 3022,1237.5 3022,1217.5
  region: 3072,1112.5 3072,1132.5 3022,1132.5 3022,1112.5
  region: 1812.2,1574.02 1812.2,1594.02 1762.2,1594.02 1762.2,1574.02
  region: 1890.94,1574.02 1890.94,1594.02 1840.94,1594.02 1840.94,1574.02
  region: 2048.42,1564.02 2048.42,1584.02 1998.42,1584.02 1998.42,1564.02
  region: 2205.91,1574.02 2205.91,1594.02 2155.91,1594.02 2155.91,1574.02
  region: 2048.42,1445.91 2048.42,1465.91 1998.42,1465.91 1998.42,1445.91
  region: 1890.94,1445.91 1890.94,1465.91 1840.94,1465.91 1840.94,1445.91
  region: 2048.43,1337.8 2048.43,1357.8 1998.43,1357.8 1998.43,1337.8
  region: 2127.17,1288.43 2127.17,1308.43 2077.17,1308.43 2077.17,1288.43
  region: 2205.91,1180.32 2205.91,1200.32 2155.91,1200.32 2155.91,1180.32
  region: 2087.79,983.46 2087.79,1003.46 2037.79,1003.46 2037.79,983.46
  region: 2127.16,894.72 2127.16,914.72 2077.16,914.72 2077.16,894.72
  region: 1890.94,825.35 1890.94,845.35 1840.94,845.35 1840.94,825.35
  region: 1890.94,934.09 1890.94,954.09 1840.94,954.09 1840.94,934.09
  region: 1890.63,1052.52 1890.63,1072.52 1840.63,1072.52 1840.63,1052.52
  region: 1851.57,1180.32 1851.57,1200.32 1801.57,1200.32 1801.57,1180.32
  region: 1575.98,1180.31 1575.98,1200.31 1525.98,1200.31 1525.98,1180.31
  region: 1575.98,944.09 1575.98,964.09 1525.98,964.09 1525.98,944.09
  rectangle: 1585.35,1593.39 1605.35,1643.39
  rectangle: 1496.61,1357.17 1516.61,1407.17
  rectangle: 1654.09,1357.17 1674.09,1407.17
  rectangle: 1772.2,1278.43 1792.2,1328.43
  rectangle: 1900.31,1317.8 1920.31,1367.8
  rectangle: 1900.31,1199.69 1920.31,1249.69
  rectangle: 1900,1120.63 1920,1170.63
  rectangle: 2057.8,1081.57 2077.8,1131.57
  rectangle: 2215.28,1081.57 2235.28,1131.57
  rectangle: 2330,1298.11 2350,1348.11
  rectangle: 2334.68,1435.91 2354.68,1485.91
  rectangle: 2330,1022.52 2350,1072.52
  rectangle: 2330,865.04 2350,915.04
  rectangle: 1939.68,963.46 1959.68,1013.46
  rectangle: 1772.52,1002.52 1792.52,1052.52
  rectangle: 1703.46,1081.57 1723.46,1131.57
  rectangle: 1664.09,1199.68 1684.09,1249.68
  rectangle: 1584.72,1042.2 1604.72,1092.2
  rectangle: 607,1433.27 627,1483.27
  rectangle: 570,1315 590,1365
  rectangle: 1020,1355 1040,1405
  rectangle: 1020,1433.27 1040,1483.27
  region: 850,1490 850,1510 800,1510 800,1490
  region: 2048.43,1209.69 2048.43,1229.69 1998.43,1229.69 1998.43,1209.69
  region: 1654.72,776.61 1654.72,796.61 1604.72,796.61 1604.72,776.61
  region: 2048.11,776.93 2048.11,796.93 1998.11,796.93 1998.11,776.93
  region: 2225.59,780 2225.59,800 2175.59,800 2175.59,780
  region: 2735,-350 2715,-350 2715,-400 2735,-400
  lines w4: 2707,-386 2707,-412 2743,-412 2743,-386 ; 2707,-364 2707,-338 2743,-338 2743,-364
  lines w10: -475,-475 3250,-475 3250,-900 ; 1300,-900 1300,-475 ; 1300,-770 3250,-770 ; -475,-900 -475,2550 4125,2550 4125,-900 -475,-900
  text "Bottom Assembly Drawing" at 3300,2300 h250
  text "NOTE:" at 4000,-300 h125
  text "are one of C101-162 and have the same values (0.1uF cap. in 0402)." at 2650,-400 h100
  text "Components of symbol" at 3775,-400 h100
  text "1)" at 3900,-400 h100
  text "Title:" at 3200,-575 h100
  text "Johns Hopkins University" at 1250,-625 h150
  text "IEEE-1394/Ethernet FPGA" at 3100,-700 h150
  text "Laboratory for Computational" at 1175,-750 h100
  text "Sensing and Robotics" at 1175,-850 h100
  text "2.1" at 1550,-865 h100
  text "Rev:" at 1825,-865 h100
  text ".Print_Date" at 2925,-865 h100
  text "Date:" at 3200,-865 h100
Drill Drawing:
  lines w5: 4110,1210 4532.16,1212.16 cw(c4532.16,1012.16) 4673.58,1153.58 ccw(c4815,1295) 4815,1095 5095,1095 ccw(c5095,1295) 5236.42,1153.58 cw(c5377.84,1012.16) 5377.84,1212.16 5805,1210
  lines w8: 490,2290 475,2250 ; 515,2265 475,2250 ; 1290,2290 1275,2250 ; 1315,2265 1275,2250 ; 1380,2355 1275,2250 ; 1515,2355 580,2355 475,2250 ; 4415,1000 4515,1000 ; 4440,975 4515,1000 ; 4440,1025 4515,1000 ; 4530,1185 4532.16,987.16 ; 4610,1315 4725,1315 4785,1255 4745,1135 ; 4660.85,1282.45 4645,1205 ; 4700,895 4800,895 ; 4704.15,1257.45 4645,1205 ; 4705,1315 4645,1205 ; 4725,870 4800,895 ; 4725,920 4800,895 ; 4747.16,1214.03 4745,1135 ; 4794.14,1196.93 4745,1135 ; 4815,870 4815,1070 ; 4955,870 4955,1080 ; 4955,1110 4955,1295 ; 5045,870 4970,895 ; 5045,920 4970,895 ; 5045,975 4970,1000 ; 5045,1025 4970,1000 ; 5070,895 4970,895 ; 5070,1000 4970,1000 ; 5245,1095 5445,1095 ; 5390,1305 5415,1230 ; 5395,1005 5420,1080 ; 5415,1330 5415,1230 ; 5420,980 5420,1080 ; 5440,1305 5415,1230 ; 5445,1005 5420,1080
  lines w10: 5775,-475 5775,100 9500,100 ; 5775,-325 9500,-325 ; 5775,-195 7725,-195 ; 6750,685 6750,805 ; 6750,705 7350,705 ; 6750,725 7350,725 ; 6750,745 7350,745 ; 6750,765 7350,765 ; 6750,785 7350,785 ; 6750,1235 6750,1355 ; 6750,1255 7350,1255 ; 6750,1275 7350,1275 ; 6750,1295 7350,1295 ; 6750,1315 7350,1315 ; 6750,1335 7350,1335 ; 6750,1785 6750,1905 ; 6750,1805 7350,1805 ; 6750,1825 7350,1825 ; 6750,1845 7350,1845 ; 6750,1865 7350,1865 ; 6750,1885 7350,1885 ; 6875,960 6995,1080 ; 6875,1080 6995,960 ; 6875,1510 6995,1630 ; 6875,1630 6995,1510 ; 6880,960 6760,1080 6760,960 6880,1080 ; 6880,1510 6760,1630 6760,1510 6880,1630 ; 6990,960 7110,1080 7230,960 7350,1080 7350,960 7230,1080 7110,960 6990,1080 ; 6990,1510 7110,1630 7230,1510 7350,1630 7350,1510 7230,1630 7110,1510 6990,1630 ; 7350,685 7350,805 ; 7350,1235 7350,1355 ; 7350,1785 7350,1905 ; 7725,-325 7725,100 ; 8875,-475 8875,-325 ; 6355,685 7820,685 7820,805 6355,805 6355,685 ; 6355,960 7820,960 7820,1080 6355,1080 6355,960 ; 6355,1235 6355,1355 7820,1355 7820,1235 6355,1235 ; 6355,1510 7820,1510 7820,1630 6355,1630 6355,1510 ; 6355,1785 6355,1905 7820,1905 7820,1785 6355,1785
  lines w12: 4405,725 cw(c4405,1075) 4405,1425 5505,1425 cw(c5505,1075) 5505,725 4405,725
  lines w15: -675,-475 9500,-475 9500,5000 -675,5000 -675,-475
  text "Drill Legend:" at -525,4775 h200
  text "Notes:" at 5750,4750 h200
  text "1." at 5850,4600 h110
  text "Unless specified otherwise, all dimensions are in inches." at 6000,4600 h110
  text "_" at 8141,4465 h110
  text "2." at 5850,4450 h110
  text "Unless specified otherwise, all tolerances are +0.005, except:" at 6000,4450 h110
  text "_" at 7000,4340 h110
  text "Hole diameters are +0.003 for holes larger than 0.020" at 6100,4325 h110
  text "Hole diameters are +0.003 -dia. for holes 0.020 and smaller." at 6100,4200 h110
  text "3." at 5850,4050 h110
  text "Outside radiuses are 0.175 (4 places)" at 6000,4050 h110
  text "4." at 5850,3900 h110
  text "The two notches (see Detail A) are identical.  They are referenced" at 6000,3900 h110
  text "to their center-lines and are symetrical about the center-line." at 6000,3800 h110
  text "5." at 5850,3650 h110
  text "All holes and slots designated PTH are plated." at 6000,3650 h110
  text "All holes and slots designated NPTH are non-plated." at 6000,3550 h110
  text "6." at 5850,3400 h110
  text "All holes of diameter greater than 0.020 MUST remain open." at 6000,3400 h110
  text "Smaller holes may be open or plugged." at 6000,3300 h110
  text "7." at 5850,3150 h110
  text "Material: FR4 (170TG)" at 6000,3150 h110
  text "8." at 5850,3000 h110
  text "Finish: ENIG" at 6000,3000 h110
  text "9." at 5850,2850 h110
  text "RoHS Compliant: No" at 6000,2850 h110
  text ".Legend" at -450,2830 h58
  text "10." at 5800,2700 h110
  text "Solder Mask: Green LPI" at 6000,2700 h110
  text "11." at 5800,2550 h110
  text "Silk Screen: White" at 6000,2550 h110
  text "12." at 5800,2400 h110
  text "Board must be fabricated to IPC-6012B Class 2." at 6000,2400 h110
  text "See Note 4" at 1550,2315 h120
  text "_" at 7180,2265 h110
  text "13." at 5800,2250 h110
  text "Board Thickness: 62 mil, +10%" at 6000,2250 h110
  text "14." at 5800,2100 h110
  text "Layer Order and Finished Thickness:" at 6000,2100 h110
  text "Top Layer" at 6280,1950 h100
  text "1.8 mils Copper" at 7840,1950 h100
  text "Prepreg" at 6385,1815 h100
  text "6.0 mils" at 7450,1810 h100
  text "Internal Plane 1" at 6280,1675 h100
  text "1.4 mils Copper (1 Oz)" at 7840,1675 h100
  text "12.0 mils" at 7400,1545 h100
  text "Core" at 6385,1540 h100
  text "Detail A" at 4575,1490 h250
  text "Internal Layer 1" at 6280,1400 h100
  text "1.4 mils Copper (1 Oz)" at 7850,1375 h100
  text "C/L" at 4875,1320 h110
  text "R 0.050" at 4260,1280 h110
  text "Prepreg" at 6385,1265 h100
  text "12.0 mils" at 7400,1260 h100
  text "Internal Plane 2" at 6280,1125 h100
  text "1.4 mils Copper (1 Oz)" at 7840,1125 h100
  text "Core" at 6385,990 h100
  text "12.0 mils" at 7400,985 h100
  text "0.105" at 4155,965 h110
  text "0.030" at 5285,880 h110
  text "0.035" at 4440,860 h110
  text "Internal Plane 3" at 6280,850 h100
  text "1.4 mils Copper (1 Oz)" at 7850,825 h100
  text "C/L" at 4875,760 h110
  text "Prepreg" at 6385,715 h100
  text "6.0 mils" at 7450,710 h100
  text "Bottom Layer" at 6280,575 h100
  text "1.8 mils Copper" at 7840,575 h100
  text "See Note 4" at 4675,565 h150
  text "Title:" at 5825,0 h100
  text "Johns Hopkins University" at 7775,-50 h150
  text "IEEE-1394/Ethernet FPGA" at 5925,-125 h150
  text "Laboratory for Computational" at 7850,-175 h100
  text "Sensing and Robotics" at 7850,-275 h100
  text "Date:" at 5825,-290 h100
  text ".Print_Date" at 6100,-290 h100
  text "Rev:" at 7200,-290 h100
  text "2.1" at 7475,-290 h100
  text "File:" at 5825,-425 h100
  text ".Pcb_File_Name_No_Path" at 6100,-425 h100
  text "Sheet 1 of 1" at 8925,-425 h100

## Dimensions
-175,2300 to 1225,2250 on Drill Drawing
-175,2175 to 425,2250 on Drill Drawing
3650,0 to 3825,-100 on Drill Drawing
3750,-175 to 3650,0 on Drill Drawing
-125,-175 to -125,2225 on Drill Drawing
-175,2175 to 3825,2175 on Drill Drawing

## Text inside footprints (layer, text, board x,y; h text height)
U3: Top Overlay "17" at 1040,1155 h28; Top Overlay "33" at 1020,1560 h28 r90; Top Overlay "49" at 615,1545 h28 r180
U4: Top Overlay "37" at 2505,1308 h50 r90; Top Overlay "25" at 2783,1340 h50; Top Overlay "13" at 2815,1062 h50 r270
U11: Top Overlay "6" at 1386,3 h50; Top Overlay "18" at 1264,237 h50 r180; Top Overlay "12" at 1442,181 h50 r90